# EAGLE board probings (EAGLE 6.0)
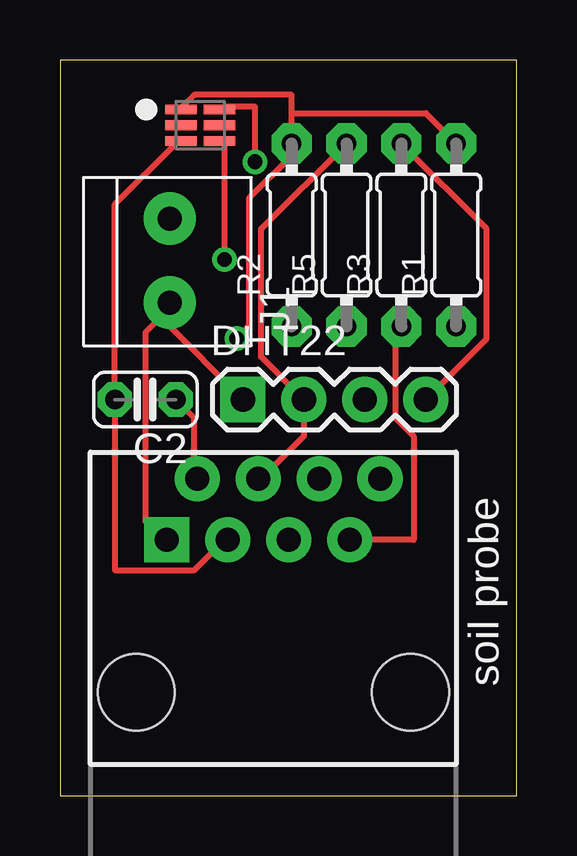
[diagram p0: board, top side]
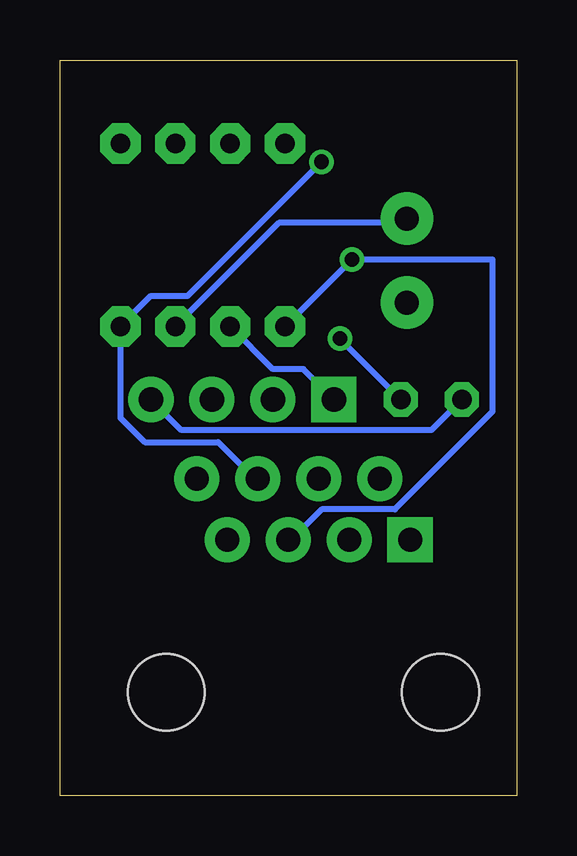
[diagram p1: board, bottom side, seen from below]

Size 19.03 x 30.66 mm. Coordinates in mm from the lower left corner, seen from the top.
Outline: 0,0 19.03,0 19.03,30.66 0,30.66 0,0
Copper layers (1*16): Top 0.035mm / dielectric 1.5mm / Bottom 0.035mm
Design rules: minimum track width 10mil, minimum drill 24mil, track to track 8mil, track to pad 8mil, pad to pad 8mil, via to via 8mil, smd to smd 8mil, copper to edge 40mil, drill to drill 8mil, minimum pad ring 10mil, minimum via ring 8mil, stop-mask expansion 4mil, vias tented up to drill 0mil, thermal gap 10mil

## Footprints (pad centres in the part's own frame; a part is rotated, then mirrored left to right if it is on the bottom)
C025-024X044 = drill 0.813 pad 1.422 octagon: 1 -1.27,0; 2 1.27,0
1X04 = drill 1.016 pad 1.88 square: 1 0,0 | drill 1.016 pad 1.88: 2 2.54,0; 3 5.08,0; 4 7.62,0
1X2-3.5MM = drill 1 pad 2.184: 1 1.8,0; 2 -1.7,0
0204/7 = drill 0.813 pad 1.676 octagon: 1 -3.81,0; 2 3.81,0
TSL2561_FN = smd 1.3 x 0.4: ADR -0.8,0; CLK 0.8,-0.65; DATA 0.8,0.65; INT 0.8,0; VDD -0.8,0.65; VSS -0.8,-0.65
RJ45-8 = drill 1 pad 1.88 square: 1 -4.445,6.35 | drill 1 pad 1.88: 2 -3.175,8.89; 3 -1.905,6.35; 4 -0.635,8.89; 5 0.635,6.35; 6 1.905,8.89; 7 3.175,6.35; 8 4.445,8.89 | hole 3.2: -5.715,0; 5.715,0

## Placement (x,y rotation side)
C2  [C025-024X044]  3.56,16.51 180 top
DHT22  [1X04]  7.62,16.51 0 top
J1  1X2-3.5MM  [1X2-3.5MM]  4.57,22.35 270 top
R1  [0204/7]  16.51,23.37 90 top
R2  [0204/7]  9.65,23.37 90 top
R3  [0204/7]  14.22,23.37 90 top
R5  [0204/7]  11.94,23.37 90 top
U1  TSL2561  [TSL2561_FN]  5.84,27.94 0 top
U$1  RJ45-8PTH  [RJ45-8]  8.89,4.32 0 top

## Library data of the parts
C2 J1 R1-R3 R5 = adafruit
DHT22 = SparkFun-Connectors
U1 = microbuilder
U$1 = SparkFun

## Nets
N$1: C2.1 R1.2 R2.2 U1.VDD U$1.2
N$2: C2.2 DHT22.4 R3.2 U1.VSS U$1.3
N$3: DHT22.1 J1.1 R5.1 U$1.1
N$4: DHT22.2 R5.2 U$1.4
N$5: J1.2 R3.1 U$1.7
SCL: R2.1 U1.CLK U$1.5
SDA: R1.1 U1.DATA U$1.6

## Tracks (layer width: path | path; a pad name or v marks a point on that pad's centre or on a via)
N$1  (via drill 0.61)
  Top 0.254: C2.1 5.59,15.75 5.59,13.21 U$1.2 | 9.65,28.45 R2.2 9.65,26.67 7.87,24.89 7.87,19.56 v7.37,19.05 | 9.65,28.45 9.65,29.21 5.59,29.21 5.08,28.7 U1.VDD | R1.2 15.24,28.45 9.65,28.45
  Bottom 0.254: v7.37,19.05 C2.1
N$2
  Top 0.254: R3.2 17.78,23.62 17.78,19.05 DHT22.4 | U1.VSS 4.83,27.18 2.29,24.64 C2.2 2.29,9.4 5.59,9.4 6.86,10.67 U$1.3
  Bottom 0.254: DHT22.4 13.97,15.24 3.56,15.24 C2.2
N$3
  Top 0.254: 4.32,20.07 4.57,20.32 J1.1 4.32,20.07 | 4.32,20.07 3.56,19.3 3.56,11.43 4.32,10.67 U$1.1 | DHT22.1 4.32,19.81 4.32,20.07
  Bottom 0.254: R5.1 10.16,17.78 8.89,17.78 DHT22.1
N$4
  Top 0.254: R5.2 8.38,23.62 8.38,18.29 DHT22.2 10.16,14.99 8.38,13.21 U$1.4
N$5
  Top 0.254: U$1.7 14.73,10.67 14.73,14.99 13.97,15.75 13.97,19.3 R3.1
  Bottom 0.254: R3.1 9.91,23.88 4.57,23.88 J1.2
SCL  (via drill 0.61)
  Top 0.254: v6.86,22.35 6.86,27.18 U1.CLK
  Bottom 0.254: R2.1 v6.86,22.35 1.02,22.35 1.02,16 5.08,11.94 8.13,11.94 9.4,10.67 U$1.5
SDA  (via drill 0.61)
  Top 0.254: v8.13,26.42 8.13,28.7 6.86,28.7 U1.DATA
  Bottom 0.254: v8.13,26.42 13.72,20.83 15.24,20.83 R1.1 16.51,15.75 15.49,14.73 12.45,14.73 10.92,13.21 U$1.6

## Text on the board
tPlace: soil probe